# EAGLE board MotorSpeedController (EAGLE 4.09)
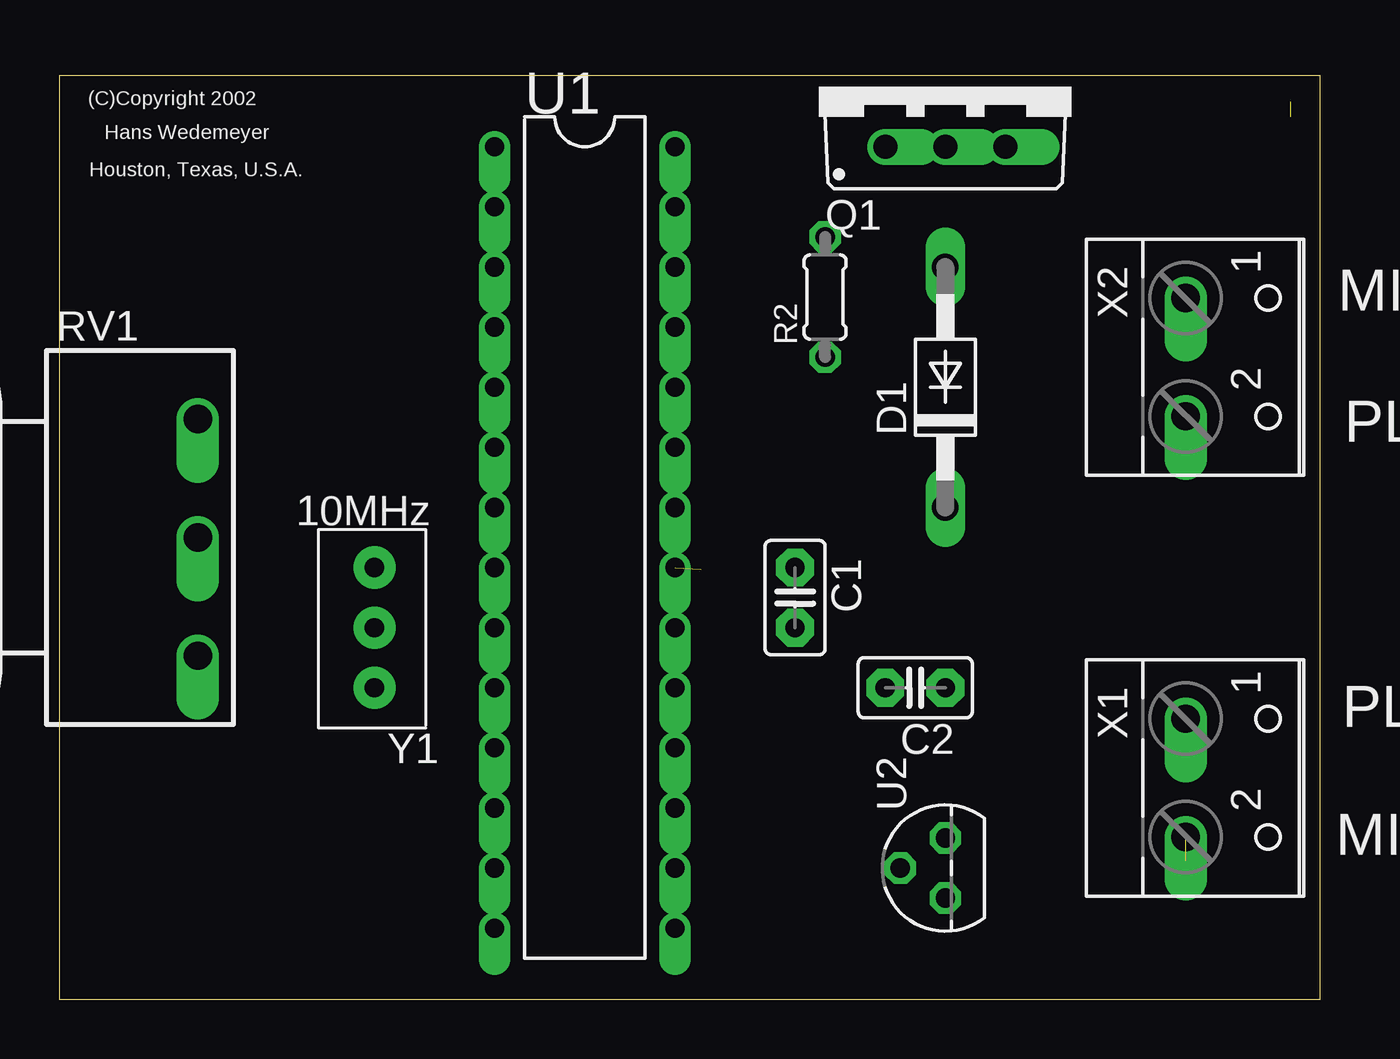
[diagram p0: board, top side]
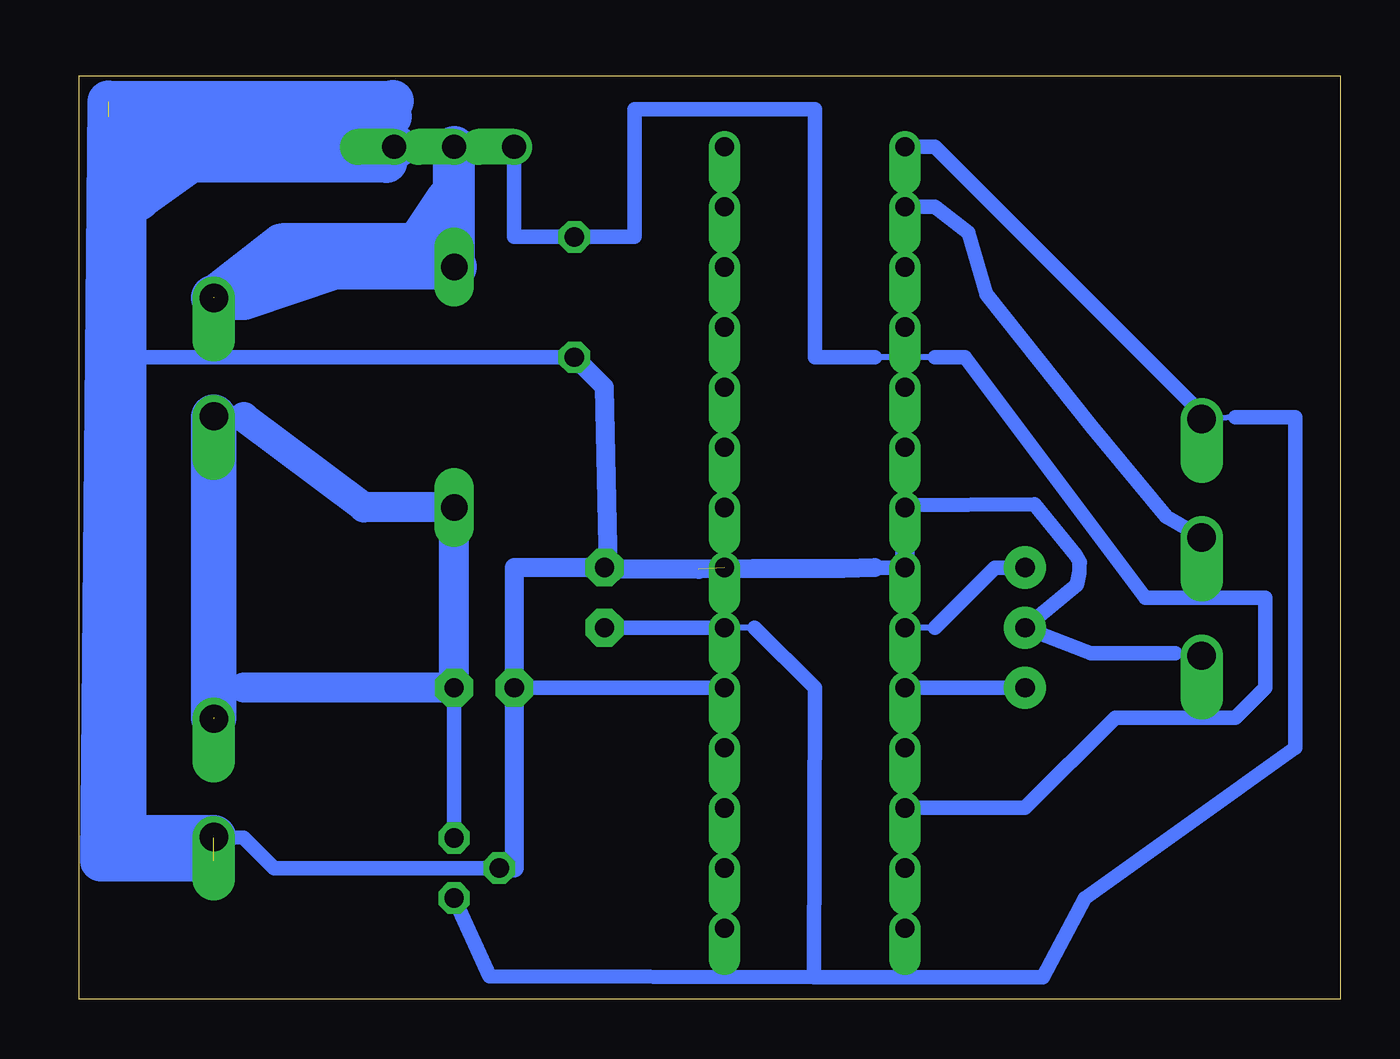
[diagram p1: board, bottom side, seen from below]

Size 53.32 x 39.04 mm. Coordinates in mm from the lower left corner, seen from the top.
Outline: 0,0 53.32,0 53.32,39.04 0,39.04 0,0
Copper layers used: Bottom

## Footprints (pad centres in the part's own frame; a part is rotated, then mirrored left to right if it is on the bottom)
C2.5-2 = drill 0.813 pad 1.6 octagon: 1 -1.27,0; 2 1.27,0
DO41-10 = drill 1.118 long: A 5.08,0; C -5.08,0
TO220BV = drill 1.016 offset: D 0,-2.54; G -2.54,-2.54; S 2.54,-2.54
0204/5 = drill 0.813 octagon: 1 -2.54,0; 2 2.54,0
PC16S = drill 1.2 offset: 1A -5,6.5; 1E 5,6.5; 1S 0,6.5
DIL28-3 = drill 0.813 offset: 1 -16.51,-3.81; 2 -13.97,-3.81; 3 -11.43,-3.81; 4 -8.89,-3.81; 5 -6.35,-3.81; 6 -3.81,-3.81; 7 -1.27,-3.81; 8 1.27,-3.81; 9 3.81,-3.81; 10 6.35,-3.81; 11 8.89,-3.81; 12 11.43,-3.81; 13 13.97,-3.81; 14 16.51,-3.81; 15 16.51,3.81; 16 13.97,3.81; 17 11.43,3.81; 18 8.89,3.81; 19 6.35,3.81; 20 3.81,3.81; 21 1.27,3.81; 22 -1.27,3.81; 23 -3.81,3.81; 24 -6.35,3.81; 25 -8.89,3.81; 26 -11.43,3.81; 27 -13.97,3.81; 28 -16.51,3.81
TO92 = drill 0.813 octagon: 1 -1.27,0; 2 0,1.905; 3 1.27,0
W237-102 = drill 1.194 offset: 1 -2.5,-1.27; 2 2.5,-1.27
3PIN_SIL = drill 0.813 pad 1.778 round: 1 0,2.54; 2 0,0; 3 0,-2.54

## Placement (x,y rotation side)
C1  100nF  [C2.5-2]  31.11,16.98 270 top
C2  100nF  [C2.5-2]  36.19,13.17 180 top
D1  UF4007  [DO41-10]  37.46,25.87 90 top
Q1  IRL1004  [TO220BV]  37.46,38.57 0 top
R2  [0204/5]  32.38,29.68 90 top
RV1  PC16S  [PC16S]  -0.64,19.52 270 top
U1  PIC16F876  [DIL28-3]  22.22,19.52 270 top
U2  78L05  [TO92]  37.46,5.55 90 top
X1  [W237-102]  48.89,9.36 270 top
X2  [W237-102]  48.89,27.14 270 top
Y1  10MHz  [3PIN_SIL]  13.33,15.71 180 top

## Library data of the parts
C1 C2 = capacitor-wima
D1 = diode
Q1 = transistor-power
R2 = rcl
RV1 = piher
U1 = microchip
U2 = linear
X1 X2 = con-wago-500
Y1 = 2_MyLib

## Nets
GND: C1.1 C2.2 Q1.S R2.1 RV1.1E U1.7 U1.8 U1.19 U1.21 U2.2 X1.2 Y1.2
N$2: U1.10 Y1.1
N$3: RV1.1S U1.2
N$4: C1.2 RV1.1A U1.1 U1.20 U2.1
N$5: Q1.G R2.2 U1.12
N$6: U1.9 Y1.3
N$7: D1.A Q1.D X2.1
N$9: C2.1 D1.C U2.3 X1.1 X2.2

## Tracks (layer width: path | path; a pad name or v marks a point on that pad's centre or on a via)
GND  (3 unrouted)
  Bottom 0.254: RV1.1E 6.98,14.62
  Bottom 0.61: U1.19 C2.2 34.92,5.55 | 34.92,5.55 U2.2 | 34.92,5.55 45.08,5.55 46.35,6.82 X1.2 | 6.98,14.62 10.55,14.62 Y1.2 11.14,17.53 11.03,18.04 11.03,18.34 11.02,18.48 11.18,18.77 12.94,20.93 18.41,20.88 | U1.8 19.68,18.25 | 30.93,18.17 C1.1 | R2.1 51.43,27.14
  Bottom 0.813: 19.68,18.25 21.01,18.2 24.82,18.2 27.12,18.17 30.93,18.17 31.11,25.87 R2.1 | 18.41,20.88 U1.8 18.43,20.83 U1.7 | 34.92,5.55 34.92,18.25 C1.1
  Bottom 1.778: 50.8,33.81 48.57,35.39 40.32,35.39 42.51,35.65 Q1.S | 40.06,37.95 52.07,37.94 52.38,5.87 47.62,5.87 | 40.13,37.32 52.07,37.3
  Bottom 1.93: Q1.S 51.43,36.03 51.43,28.41 | 51.43,27.14 51.43,28.41 | 47.62,6.82 51.43,6.82 51.43,28.41
N$2
  Bottom 0.61: Y1.1 U1.10
N$3
  Bottom 0.61: U1.2 17.14,33.49 15.73,32.4 14.97,29.8 10.53,24.21 7.35,20.4 RV1.1S
N$4
  Bottom 0.254: 4.44,24.6 RV1.1A 5.71,24.6 | 24.76,15.71 U1.20
  Bottom 0.61: U1.20 C1.2 | 22.25,0.94 12.58,0.94 10.79,4.28 1.9,10.63 1.9,24.6 4.44,24.6 | 22.25,0.94 35.97,0.97 U2.1 | 5.71,24.6 17.14,36.03 U1.1 | 24.76,15.71 22.22,13.17 22.25,0.94
N$5
  Bottom 0.254: 17.14,27.14 19.68,27.14
  Bottom 0.61: 17.14,27.14 15.87,27.14 8.25,16.98 3.17,16.98 3.17,13.17 4.44,11.9 9.52,11.9 13.33,8.09 U1.12 | 19.68,27.14 22.22,27.14 22.22,37.62 29.84,37.62 29.84,32.22 R2.2 34.92,32.22 Q1.G
N$6
  Bottom 0.254: 17.14,15.71 U1.9
  Bottom 0.61: 17.14,15.71 14.6,18.25 Y1.3
N$7  (1 unrouted)
  Bottom 1.778: D1.A Q1.D | 47.62,29.68 44.76,31.9 39.05,31.9 37.78,33.81
  Bottom 1.93: D1.A 42.54,30.95 46.35,29.68 X2.1
N$9  (1 unrouted)
  Bottom 0.254: 46.35,13.17 X1.1 | 46.35,24.6 X2.2
  Bottom 0.61: U2.3 C2.1
  Bottom 1.27: 46.35,13.17 C2.1 D1.C 41.27,20.79 46.35,24.6
  Bottom 1.93: 47.62,11.9 47.62,24.6

## Text on the board
tPlace: (C)Copyright 2002 | Hans Wedemeyer | Houston, Texas, U.S.A. | MINUS | MOTOR | PLUS | PLUS | 12 Volt Supply | MINUS